# Altium PCB PCB_ERV-controller_2026-01-07.pcbdoc
Units mil, origin at the board's own origin, x right, y up, seen from the top; angles counter-clockwise.
Board outline 3667.48 x 3490.19 mil, 2 copper layers (Top Layer, Bottom Layer); 37 components, 28 nets, 179 pads, 87 vias.
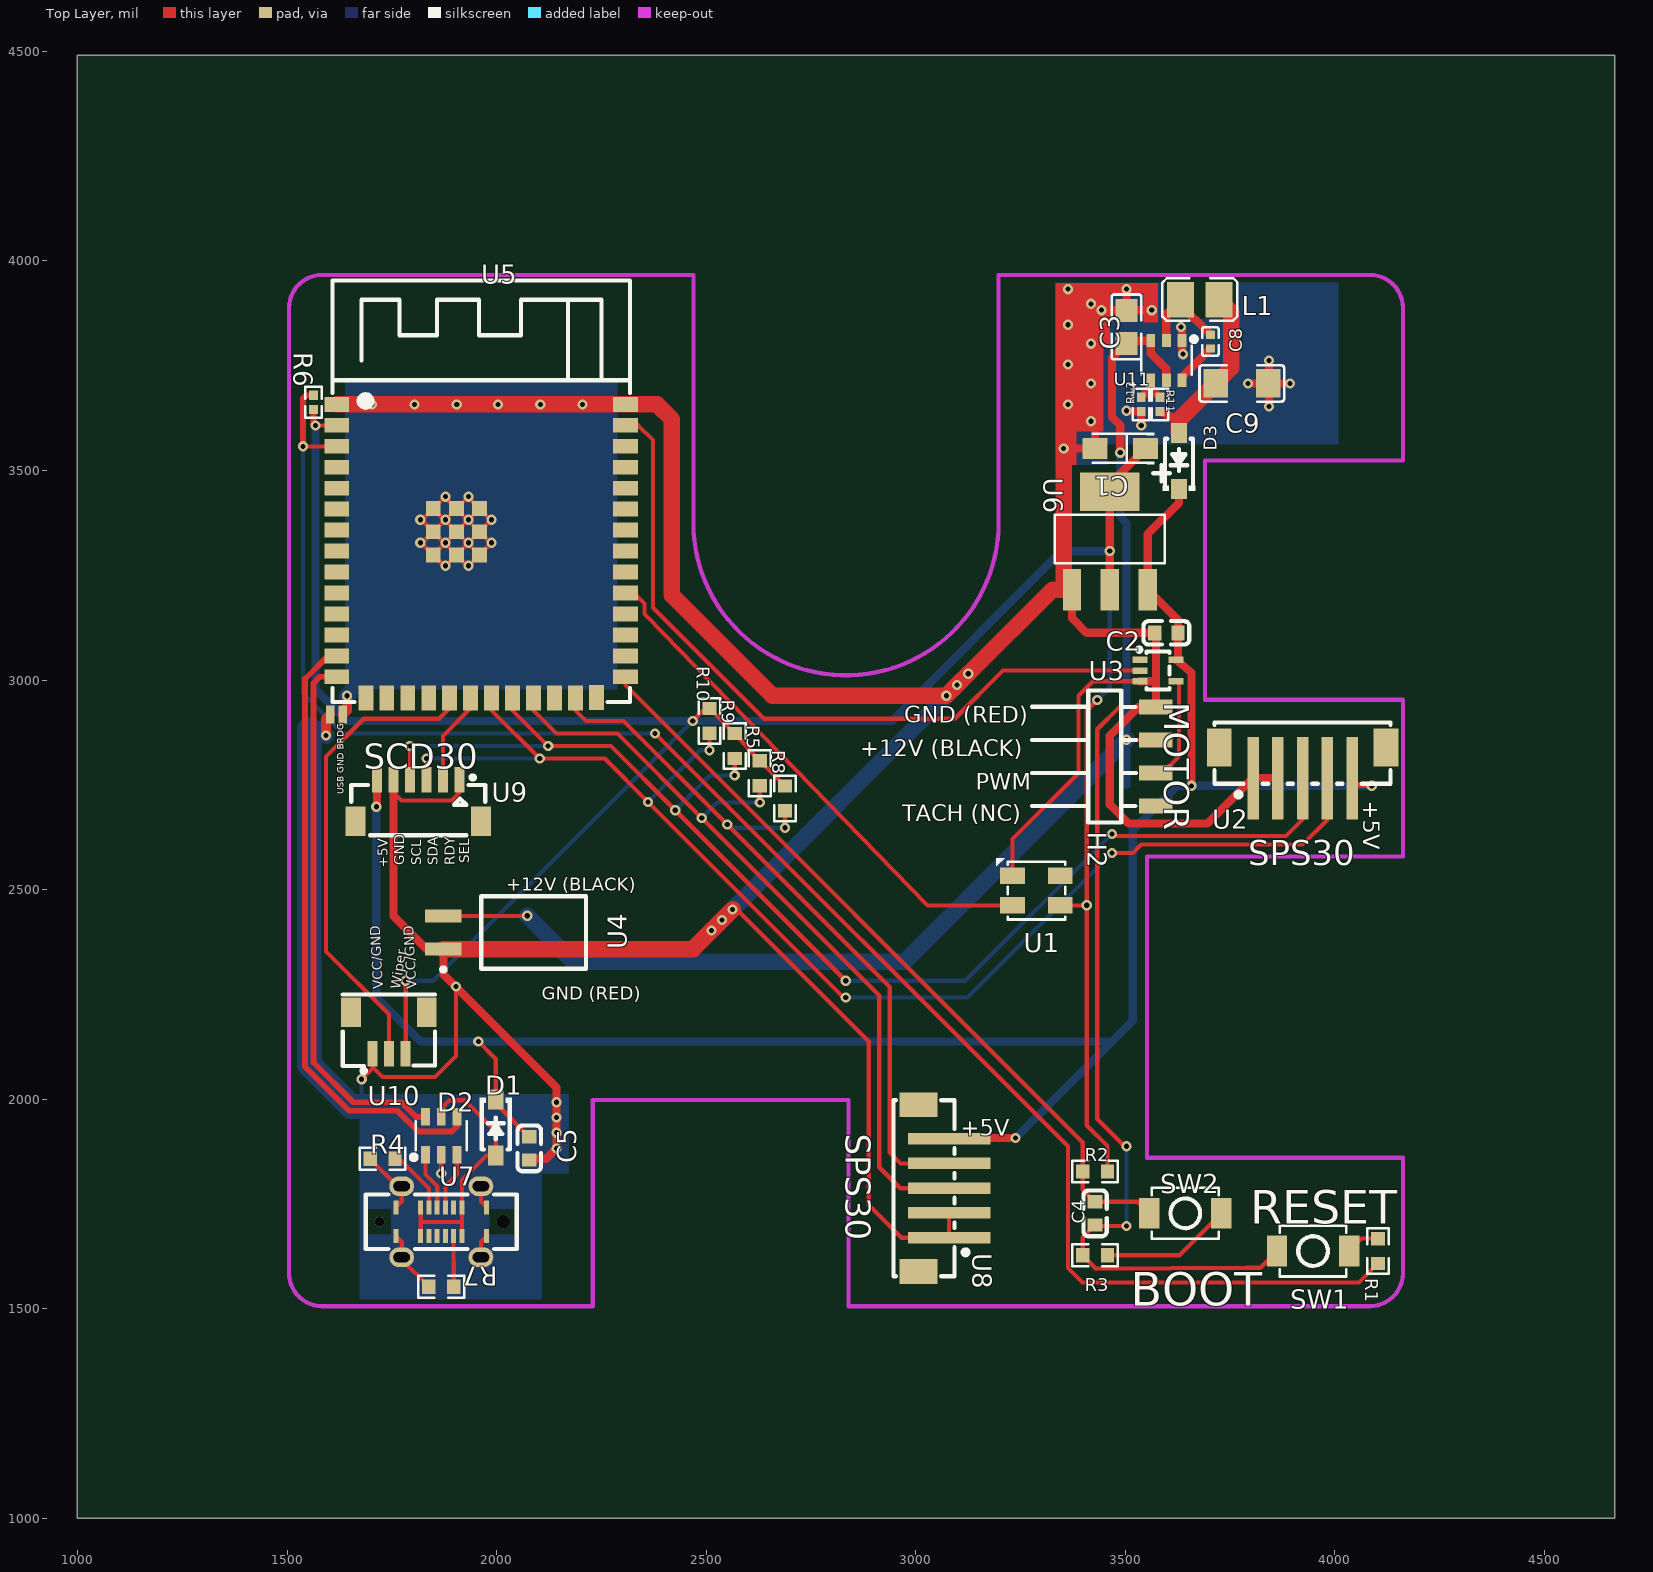
[diagram p0: Top Layer view]
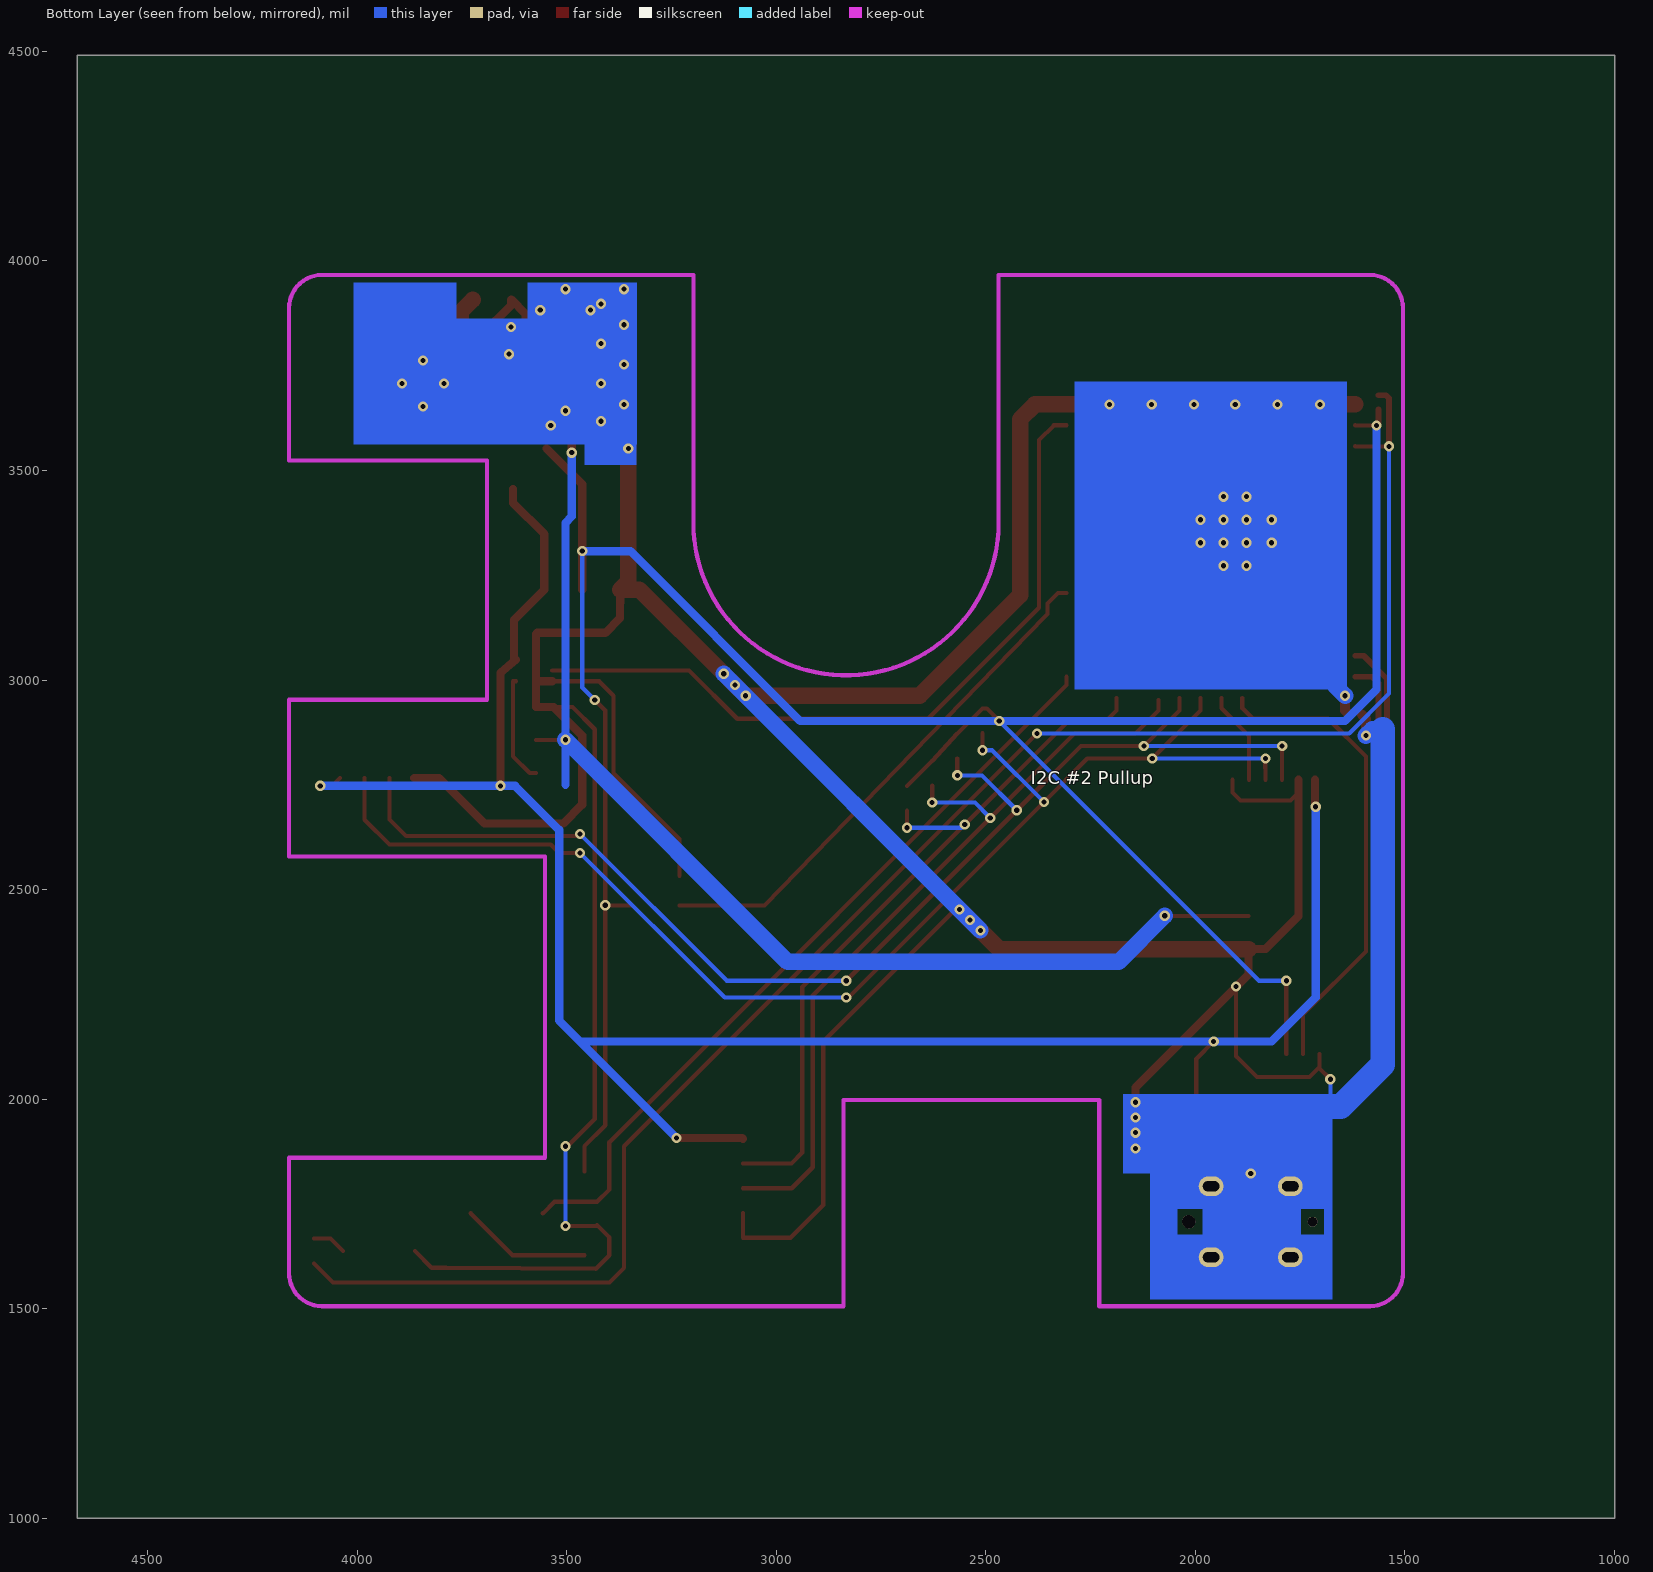
[diagram p1: Bottom Layer view, seen from below]

## Layer stack, top to bottom
Top Layer: signal copper (thickness not stored)
Dielectric: dielectric 12.6, FR-4, Dk 4.8
Bottom Layer: signal copper (thickness not stored)

## Board outline
4667.48,1000 1000,1000 1000,4490.19 4667.48,4490.19

## Components (designator, comment, footprint, x,y, rotation, side; value= is the part's Value field where it differs from the comment)
C1 "10uF" CAP-SMD_L3.2-W1.6-RD-C7171 3488.11,3552.5 r180 top
C2 "0.1u" C0603 3598.11,3112.5 r180 top
C3 "22uF" C0805 3503.11,3842.5 r90 top
C4 "0.1u" C0603 3428.11,1727.5 r90 top
C5 "0.1u" C0603 2078.11,1882.5 r270 top
C8 "100nF" C0402 3703.11,3807.5 r270 top
C9 "47uF" C1206 3778.11,3707.5 r180 top
D1 "B5819W_C8598" SOD-123_L2.7-W1.6-LS3.7-RD-1 1998.11,1932.5 r270 top
D2 "USBLC6-2SC6_C2687116" SOT-23-6_L2.9-W1.6-P0.95-LS2.8-BL 1868.11,1912.5 r0 top
D3 "B5819W_C8598" SOD-123_L2.7-W1.6-LS3.7-RD-1 3628.11,3522.5 r90 top
H2 "HX PZ2.0-1X4P WT" HDR-SMD_4P-P2.00-H-M-W6.0-N 3573.11,2817.5 r270 top
L1 "4.7uH" L1008 3678.11,3907.5 r0 top
R1 "100" R0603 4103.11,1637.5 r270 top
R2 "10k" R0603 3428.11,1827.5 r0 top
R3 "100" R0603 3428.11,1627.5 r180 top
R4 "5.1k" R0603 1728.11,1857.5 r0 top
R5 "10k" R0603 2628.11,2777.5 r90 top
R6 "10kΩ" R0402 1563.11,3662.5 r270 top
R7 "5.1k" R0603 1868.11,1552.5 r0 top
R8 "10k" R0603 2688.11,2717.5 r270 top
R9 "10k" R0603 2568.11,2842.5 r90 top
R10 "10k" R0603 2508.11,2902.5 r270 top
R11 "56.2kΩ" R0402 3583.11,3657.5 r270 top
R12 "10kΩ" R0402 3538.11,3657.5 r90 top
SW1 "TS-1088-AR02016" SW-SMD_L3.9-W3.0-P4.45 3948.11,1637.5 r0 top
SW2 "TS-1088-AR02016" SW-SMD_L3.9-W3.0-P4.45 3643.11,1727.5 r0 top
U1 "SK6812MINI-HS" LED-SMD_4P-L3.5-W3.5-BR_SK6812MINI-HS 3288.11,2497.5 r180 top
U2 "B5B-ZR-SM4-TFT(LF)(SN)" CONN-SMD_B5B-ZR-SM4-TFT 3923.11,2802.5 r0 top
U3 "SN74LV1T34DCKR" SC-70-5_L2.1-W1.3-P0.65-LS2.1-BR 3578.11,3022.5 r180 top
U4 "HX PM2.0-1X2P WT" HDR-SMD_HX-PM2.0-1X2P-WT 1873.11,2397.5 r90 top
U5 "ESP32-S3-WROOM-1(N8R8)" WIRELM-SMD_ESP32-S3-WROOM-1 1963.11,3307.5 r0 top
U6 "AZ1117CH-3.3TRG1" SOT-223-3_L6.5-W3.4-P2.30-LS7.0-BR 3463.11,3332.5 r270 top
U7 "TYPE-C 16P LTH6.8" USB-C-SMD_TYPE-C-16P-LTH6.8 1868.11,1707.5 r0 top
U8 "B5B-ZR-SM4-TFT(LF)(SN)" CONN-SMD_B5B-ZR-SM4-TFT 3043.11,1787.5 r90 top
U9 "BM06B-SRSS-TB(LF)(SN)" CONN-SMD-6P-P1.00_BM06B-SRSS-TB-LF-SN 1813.11,2712.5 r0 top
U10 "BM03B-SRSS-TB(LF)(SN)" CONN-SMD-3P-P1.00_BM03B-SRSS-TB-LF-SN 1743.11,2157.5 r180 top
U11 "TPS561208DDCR" TSOT-23-6_L2.9-W1.6-P0.95-LS2.8-BR 3598.11,3762.5 r90 top

## Footprints (in the part's own frame and the unit in brackets; to place one, negate y for a bottom-side part, rotate by r counter-clockwise, add the part's x,y. Pads: shape width x height; smd on the part's side, far side on the other; paste and mask are expansions set on the pad)
C0402 [mm]
  rect 0.5x0.54 smd paste+0 mask+0.051: 1(-0.42,0) 2(0.42,0)
  silkscreen extent -0.87,-0.5 0.87,0.5
C0603 [mm]
  rect 0.8x0.9 smd paste+0 mask+0.051: 1(-0.7,0) 2(0.7,0)
  silkscreen extent -1.39,-0.71 1.39,0.71
C0805 [mm]
  rect 1.41x1.35 smd paste-100 mask+0.051: 1(-1,0) 2(1,0)
  silkscreen extent -1.96,-0.9 1.96,0.9
C1206 [mm]
  rect 1.485x1.728 smd paste-100 mask+0.051: 1(-1.593,0) 2(1.593,0)
  silkscreen extent -2.56,-1.09 2.56,1.09
CAP-SMD_L3.2-W1.6-RD-C7171 [mm]
  rect 1.53x1.296 smd paste+0 mask+0.051: 1(-1.53,0) 2(1.53,0)
  silkscreen extent -3,-0.95 1.68,2
CONN-SMD-3P-P1.00_BM03B-SRSS-TB-LF-SN [mm]
  rect 0.6x1.55 smd paste+0 mask+0.051: 1(1,1.263) 2(0,1.263) 3(-1,1.263)
  rect 1.2x1.8 smd paste+0 mask+0.051: 4(2.3,-1.262) 5(-2.3,-1.263)
  silkscreen extent -2.8,-2.34 2.8,2.41
CONN-SMD-6P-P1.00_BM06B-SRSS-TB-LF-SN [mm]
  rect 0.6x1.55 smd paste+0 mask+0.051: 1(2.5,1.263) 2(1.5,1.263) 3(0.5,1.263) 4(-0.5,1.263) 5(-1.5,1.263) 6(-2.5,1.262)
  rect 1.2x1.8 smd paste+0 mask+0.051: 7(-3.8,-1.263) 8(3.8,-1.263)
  silkscreen extent -4.06,-2.1 4.06,1.52
CONN-SMD_B5B-ZR-SM4-TFT [mm]
  rect 0.7x5 smd paste+0 mask+0.05: 1(-3,-0.925) 2(-1.5,-0.925) 3(0,-0.925) 4(1.5,-0.925) 5(3,-0.925)
  rect 1.5x2.3 smd paste+0 mask+0.05: 6(5.05,0.925) 7(-5.05,0.925)
  silkscreen extent -5.33,-2.08 5.33,2.43
HDR-SMD_4P-P2.00-H-M-W6.0-N [mm]
  rect 0.89x2.03 smd paste+0 mask+0.05: 1(-3,0) 2(-1,0) 3(1,0) 4(3,0)
  silkscreen extent -4,-7.5 4,-1.2
HDR-SMD_HX-PM2.0-1X2P-WT [mm]
  rect 0.8x2.2 smd paste+0 mask+0.05: 1(-1,0) 2(1,0)
  silkscreen extent -2.37,-8.65 2.2,0.13
L1008 [mm]
  rect 1.635x2.16 smd paste-100 mask+0.051: 1(-1.168,0) 2(1.167,0)
  silkscreen extent -2.27,-1.27 2.27,1.3
LED-SMD_4P-L3.5-W3.5-BR_SK6812MINI-HS [mm]
  rect 1.5x1 smd paste+0 mask+0.051: 1(1.45,-0.9) 2(1.45,0.9) 3(-1.45,0.9) 4(-1.45,-0.9)
  silkscreen extent -1.75,-1.97 2.42,1.75
R0402 [mm]
  rect 0.566x0.54 smd paste-100 mask+0.051: 1(-0.433,0) 2(0.433,0)
  silkscreen extent -0.94,-0.5 0.94,0.5
R0603 [mil]
  rect 31.75x34.02 smd paste-3937.01 mask+2: 1(-29.65,0) 2(29.65,0)
  silkscreen extent -55,-26 55,26
SC-70-5_L2.1-W1.3-P0.65-LS2.1-BR [mm]
  rect 0.9x0.4 smd paste+0 mask+0.051: 1(1.1,-0.65) 2(1.1,0) 3(1.1,0.65) 4(-1.1,0.65) 5(-1.1,-0.65)
  silkscreen extent -0.7,-1.4 1.27,1.15
SOD-123_L2.7-W1.6-LS3.7-RD-1 [mm]
  rect 1.2x0.95 smd paste+0 mask+0.051: 1(-1.7,0) 2(1.7,0)
  silkscreen extent -1.81,-0.98 1.35,0.98
SOT-23-6_L2.9-W1.6-P0.95-LS2.8-BL [mm]
  rect 0.532x1.072 smd paste+0 mask+0.051: 1(-0.95,-1.149) 2(0,-1.149) 3(0.95,-1.149) 4(0.95,1.149) 5(0,1.149) 6(-0.95,1.149)
  silkscreen extent -1.82,-1.45 1.54,0.89
SOT-223-3_L6.5-W3.4-P2.30-LS7.0-BR [mm]
  rect 2.5x1.1 smd paste+0 mask+0.051: 1(2.97,-2.3) 2(2.97,0) 3(2.97,2.3)
  rect 2.34x3.6 smd paste+0 mask+0.051: 4(-2.97,0)
  silkscreen extent -1.57,-3.33 1.37,3.33
SW-SMD_L3.9-W3.0-P4.45 [mm]
  rect 1.23x1.86 smd paste+0 mask+0.051: 1(-2.185,0) 2(2.185,0)
  silkscreen extent -2.03,-1.54 2.03,1.54
TSOT-23-6_L2.9-W1.6-P0.95-LS2.8-BR [mm]
  rect 0.8x0.532 smd paste+0 mask+0.051: 1(1.2,-0.95) 2(1.2,0) 3(1.2,0.95) 4(-1.2,0.95) 5(-1.2,0) 6(-1.2,-0.95)
  silkscreen extent -0.88,-1.82 1.44,1.53
USB-C-SMD_TYPE-C-16P-LTH6.8 [mm]
  oval 1.5x1.2 hole 0.61 slot 1 at 0 deg paste+0 mask+0.051: 1(-2.4,2.15) 2(-2.4,-2.15) 3(2.4,2.15) 4(2.4,-2.15)
  rect 0.3x0.87 smd paste-100 mask+0.051: A1(-2.75,0.865) A4(-1.25,0.865) A5(-0.75,0.865) A6(-0.25,0.865) A7(0.25,0.865) A8(0.75,0.865) A9(1.25,0.865) A12(2.75,0.865) B1(2.75,-0.865) B4(1.25,-0.865) B5(0.75,-0.865) B6(0.25,-0.865) B7(-0.25,-0.865) B8(-0.75,-0.865) B9(-1.25,-0.865) B12(-2.75,-0.865)
  round 0.6 hole 0.6 unplated paste+0: ""(-3.75,0)
  round 0.8 hole 0.8 unplated paste+0: ""(3.75,0)
  silkscreen extent -4.57,-1.65 4.57,1.65
WIRELM-SMD_ESP32-S3-WROOM-1 [mm]
  rect 1.5x0.9 smd paste+0 mask+0.05: 1(-8.75,8.895) 2(-8.75,7.625) 3(-8.75,6.355) 4(-8.75,5.085) 5(-8.75,3.815) 6(-8.75,2.545) 7(-8.75,1.275) 8(-8.75,0.005) 9(-8.75,-1.265) 10(-8.75,-2.535) 11(-8.75,-3.805) 12(-8.75,-5.075) 13(-8.75,-6.345) 14(-8.75,-7.615) 27(8.75,-7.615) 28(8.75,-6.345) 29(8.75,-5.075) 30(8.75,-3.805) 31(8.75,-2.535) 32(8.75,-1.265) 33(8.75,0.005) 34(8.75,1.275) 35(8.75,2.545) 36(8.75,3.815) 37(8.75,5.085) 38(8.75,6.355) 39(8.75,7.625) 40(8.75,8.895)
  rect 0.9x1.5 smd paste+0 mask+0.05: 15(-6.985,-8.895) 16(-5.715,-8.895) 17(-4.445,-8.895) 18(-3.175,-8.895) 19(-1.905,-8.895) 20(-0.635,-8.895) 21(0.635,-8.895) 22(1.905,-8.895) 23(3.175,-8.895) 24(4.445,-8.895) 25(5.715,-8.895) 26(6.985,-8.865)
  rect 0.9x0.9 smd paste+0 mask+0.051: 41(-2.9,-0.225) 41(-2.9,1.175) 41(-2.9,2.575) 41(-1.501,-0.225) 41(-1.501,1.175) 41(-1.501,2.575) 41(-0.1,-0.225) 41(-0.1,1.175) 41(-0.1,2.575)
  silkscreen extent -9,-9.14 9.02,16.39

## Free pads (board coordinates)
  rect 20.95x42.2 smd paste+0 mask+2: 2(1633.11,2917.5) 3(1603.11,2917.5)

## Via types
v1: diameter 24.41, hole 12.2, Top Layer to Bottom Layer, tented both sides, 87 vias

## Nets (pads, with @x,y where several pads share a name; then routed paths per layer and width w, separated by ;. In a path a pad name is that pad's centre, name@x,y a point inside that pad or via, vN(x,y) a via of type N, cw(c..) or ccw(c..) an arc to the next point about the centre after c; other vN are vias at no path point)
+3V3: C1.1 R2.2 R5.2 R6.2 R8.1 R9.2 R10.1 U1.3 U5.2 U6.2 U6.4 U10.3 | length 6200.2
  Top Layer w10: v1(1568.11,3607.5) 1618.43,3607.5 U5.2 ; U10.3 1783.11,2108.42 v1(1783.11,2282.5) ; v1(2468.11,2902.5) 2497.77,2932.16 R10.1 R9.2 R5.2 R8.1 ; U1.3 v1(3408.11,2462.48) ; v1(3433.11,2952.5) 3408.11,2927.5 v1(3408.11,2462.48) ; R2.2 3457.81,1887.8 3408.11,1937.5 v1(3408.11,2462.48)
  Top Layer w13.78: R6.2 1563.11,3612.5 v1(1568.11,3607.5)
  Top Layer w19.68: U6.2 v1(3463.11,3307.5) U6.4 3463.11,3467.26 C1.1
  Bottom Layer w10: v1(1783.11,2282.5) 1848.11,2282.5 v1(2468.11,2902.5) ; v1(3433.11,2952.5) 3463.11,2982.5 v1(3463.11,3307.5)
  Bottom Layer w19.68: v1(1568.11,3607.5) 1568.11,2977.5 1629.91,2915.7 1643.11,2902.5 2943.11,2902.5 3348.11,3307.5 v1(3463.11,3307.5)
+5V: C2.1 C5.1 D1.1 D3.1 U2.5 U3.5 U6.3 U8.5 U9.6 | length 5062.8
  Top Layer w10: v1(1956.58,2137.5) 1998.11,2095.97 D1.1 1998.11,1990.06 C5.1 ; U2.5 4059.8,2747.5 v1(4088.11,2747.5)
  Top Layer w19.68: v1(1713.11,2697.5) 1714.69,2699.08 U9.6 ; U8.5 3081.42,1907.5 v1(3238.11,1907.5) ; U6.3@3553.66,3215.5 3553.66,3348.05 3628.11,3422.5 D3.1 ; U6.3 3625.67,3143.57 C2.1 3625.67,3052.34 U3.5 3658.11,3017.5 v1(3658.11,2747.5)
  Bottom Layer w19.68: v1(1713.11,2697.5) 1713.11,2242.5 1818.11,2137.5 v1(1956.58,2137.5) 3468.11,2137.5 ; v1(3238.11,1907.5) 3468.11,2137.5 ; v1(4088.11,2747.5) v1(3658.11,2747.5) 3623.11,2747.5 3518.11,2642.5 3518.11,2187.5 3468.11,2137.5
C8_2: C8.2 U11.6 | length 103.7
  Top Layer w19.68: U11.6 3635.51,3723.36 C8.2
C9_2: C9.2 D3.2 L1.2 R11.2 | length 462
  Top Layer w19.68: R11.2 3628.11,3620.2 D3.2
  Top Layer w39.37: D3.2 3628.11,3620.2 C9.2 3753.11,3745.2 3753.11,3878.47 L1.2
DN1: D2.3 U7.A7 | length 137.1
  Top Layer w10: U7.A7@1877.91,1741.6 1877.91,1792.3 1905.51,1819.9 1905.51,1830.79 D2.3
DP1: D2.1 U7.A6 | length 137.1
  Top Layer w10: D2.1 1830.71,1829.99 1830.71,1819.9 1858.31,1792.3 U7.A6
FANPWM: H2.3 U3.4 | length 257.2
  Top Layer w10: H2.3 3588.31,2778.1 3628.11,2817.9 3628.11,2996.9 U3.4
FANPWM3V3: U3.2 U5.39 | length 1799.2
  Top Layer w10: U5.39 2337.91,3607.7 2373.11,3572.5 2373.11,3172.5 2638.11,2907.5 3093.11,2907.5 3208.11,3022.5 U3.2
GND: C1.2 C2.2 C3.2 C4.1 C5.2 C9.1 D2.2 H2.1 pad.2 pad.3 R3.2 R4.1 R7.1 R12.1 SW1.1 U1.1 U2.1 U2.2 U3.3 U4.1 U5.1 U5.40 U5.41 U6.1 U7.1 U7.2 U7.3 U7.4 U7.A1 U7.A12 U7.B1 U7.B12 U8.1 U8.2 U9.1 U9.5 U10.1 U11.1 | length 15075.7
  Top Layer w10: v1(1678.11,2047.5) 1703.74,2073.13 U10.1 ; R4.1@1698.45,1857.5 1763.8,1792.15 1773.62,1792.15 1773.62,1755.33 U7.A1 ; U10.1 1703.71,2076.9 1728.11,2052.5 1853.11,2052.5 1903.11,2102.5 v1(1903.11,2268.75) ; U9.5 1754.01,2731.6 1773.11,2712.5 1892.61,2712.5 1911.71,2731.6 U9.1 ; U7.B12 1773.62,1659.66 1773.62,1622.85 1773.62,1617.33 R7.1@1838.45,1552.5 ; U5.41@1848.91,3298.6 v1(1878.11,3327.5) ; U5.41@1848.91,3353.8 v1(1878.11,3382.5) ; U5.41@1848.91,3408.9 v1(1878.11,3437.5) 1878.11,3434.82 1904.05,3408.88 1930.42,3382.5 v1(1933.11,3382.5) ; v1(1868.11,1822.5) D2.2 ; U5.41@1959.17,3298.64 1933.11,3324.7 v1(1933.11,3327.5) ; U5.41@1959.21,3408.9 v1(1933.11,3382.5) ; U7.4@1962.6,1622.85 1962.6,1659.66 U7.B1 ; U7.3@1962.6,1792.15 1962.6,1755.33 U7.A12 ; v1(2563.11,2452.5) 2573.11,2452.5 2888.11,2137.5 2888.11,1747.5 2966.22,1669.39 U8.1 3079.53,1699.39 U8.2 ; U1.1 3231.01,2620.4 3388.11,2777.5 3388.11,2962.5 3422.51,2996.9 3478.71,2996.9 U3.3 ; v1(3503.11,1697.5) 3430.55,1697.5 C4.1 3398.45,1670.28 3398.45,1627.5 3430.79,1595.15 3788.11,1597.5 3822.09,1597.5 SW1.1 ; v1(3503.11,1887.5) 3498.11,1887.5 3433.11,1952.5 3433.11,2882.5 3486.21,2935.6 H2.1 ; U5.41@1848.93,3353.76 1875.18,3327.5 v1(1878.11,3327.5) ; U5.41@1848.93,3353.76 1822.67,3327.5 v1(1818.11,3327.5) 1820.06,3327.5 1848.93,3298.64 1875.06,3272.5 v1(1878.11,3272.5) 1904.01,3298.6 v1(1933.11,3327.5) ; U5.41@1848.93,3353.76 1820.18,3382.5 v1(1818.11,3382.5) 1822.55,3382.5 1848.93,3408.88 1875.3,3382.5 v1(1878.11,3382.5) ; v1(1878.11,3327.5) 1904.01,3353.8 v1(1933.11,3382.5) ; v1(1878.11,3327.5) 1878.11,3324.57 1904.05,3298.64 1930.18,3272.5 v1(1933.11,3272.5) 1959.21,3298.6 v1(1988.11,3327.5) 1985.42,3327.5 1959.17,3353.76 1933.11,3379.82 v1(1933.11,3382.5) ; v1(1878.11,3382.5) 1878.11,3379.7 1904.05,3353.76 1930.3,3327.5 v1(1933.11,3327.5) ; v1(1878.11,3382.5) 1904.01,3408.9 v1(1933.11,3437.5) 1933.11,3434.93 1959.17,3408.88 1985.54,3382.5 v1(1988.11,3382.5) 1959.21,3353.8 v1(1933.11,3327.5)
  Top Layer w19.68: U9.5 1754.01,2436.6 1832.51,2358.1 U4.1 ; U4.1 1873.11,2297.5 2143.11,2027.5 v1(2143.11,1992.55) v1(2143.11,1955.88) 2143.11,1920.05 v1(2143.11,1882.5) 2118.11,1857.5 2080.67,1857.5 C5.2 ; v1@3363.11,3552.3 C1.2 3428.11,3597.5 ; U6.1@3372.51,3215.6 3373.11,3147.5 3408.11,3112.5 C2.2@3570.51,3112.5 ; v1(3443.11,3882.5) 3502.48,3882.5 C3.2 ; v1(3503.11,3642.5) 3505.15,3640.46 R12.1 v1(3538.11,3607.5) ; v1(3503.11,3932.5) C3.2 ; v1(3563.11,3882.5) 3503.74,3882.5 C3.2 ; C2.2@3570.55,3112.5 3573.11,3109.94 3573.11,2996.91 ; v1(3633.11,3842.5) 3635.51,3840.1 U11.1 3635.51,3780.1 v1(3638.11,3777.5) ; v1(3793.11,3707.5) C9.1 ; U2.1@3805,2751.08 U2.1 ; v1(3843.11,3652.5) 3843.11,3705.2 C9.1 ; v1(3843.11,3762.5) 3843.11,3709.8 C9.1 ; U2.2 U2.1 ; v1(3893.11,3707.5) C9.1 ; 3573.11,2996.91 U3.3 3573.11,2996.91 ; 3573.11,2996.91 H2.1 3531.21,2935.6 3463.11,2867.5 3463.11,2702.5 3508.11,2657.5 3696.41,2657.5 U2.1
  Top Layer w23.62: v1(1593.11,2867.5) 1593.11,2907.5 pad.3 ; pad.2 1643.11,2927.5 v1(1643.11,2962.5)
  Top Layer w39.37: U5.1 1618.81,3657.5 v1(1703.11,3657.5) v1(1804.42,3657.5) v1(1905.08,3657.5) v1(2003.75,3657.5) v1(2104.42,3657.5) v1(2205.08,3657.5) 2307.41,3657.5 U5.40 2382.92,3657.69 2418.11,3622.5 2418.11,3202.5 2658.11,2962.5 3008.11,2962.5 v1(3073.11,2962.5) v1(3098.55,2987.94) v1(3125.55,3014.94) ; U4.1 2468.74,2358.13 v1(2563.11,2452.5) ; v1(3125.55,3014.94) 3327.21,3215.9 3372.51,3215.6 3353.11,3235 v1(3353.11,3552.19) 3353.11,3602.5
  Bottom Layer w10: 1678.11,2002.5 v1(1678.11,2047.5) ; v1(3503.11,1697.5) v1(3503.11,1887.5)
  Bottom Layer w39.37: 1558.11,2882.5 1578.11,2882.5 v1(1593.11,2867.5) ; v1(1643.11,2962.5) 1668.11,2987.5 1668.11,3002.5 ; v1(2513.11,2402.5) v1(3125.55,3014.94)
  Bottom Layer w59.05: 1553.11,2882.5 1553.11,2082.5 1653.11,1982.5 1783.11,1982.5
  other v1: 2143.11,1920.05 2538.11,2427.5 3418.11,3617.5 3363.11,3657.5 3418.11,3707.5 3363.11,3752.5 3418.11,3802.5 3363.11,3847.5 3418.11,3897.5 3363.11,3932.5
LEDCTL: U1.2 U5.31 | length 1252.9
  Top Layer w10: U5.31 2327.91,3207.7 2353.11,3182.5 2353.11,3157.5 2358.11,3152.5 3028.51,2462.1 U1.2
POTWIPER: U5.19 U10.2 | length 1139.3
  Top Layer w10: U10.2 1743.11,2202.5 1593.11,2352.5 1593.11,2817.5 1683.11,2907.5 1863.11,2907.5 1888.11,2932.5 U5.19
R1_1: R1.1 SW1.2 | length 81.3
  Top Layer w10: SW1.2 4063.79,1667.16 R1.1
R3_1: R3.1 SW2.2 | length 312.8
  Top Layer w10: R3.1 3629.13,1627.5 SW2.2
R12_2: R11.1 R12.2 U11.4 | length 100.1
  Top Layer w19.68: R12.2 3560.35,3696.79 U11.4 3560.35,3697.29 R11.1
RDY: U5.20 U9.2 | length 222.4
  Top Layer w10: U9.2 1872.15,2866.54 1938.11,2932.5 U5.20
SCL: R5.1 U5.23 U8.3 | length 1920.6
  Top Layer w10: U5.23@2088.11,2952.5 2088.11,2927.5 2143.11,2872.5 2288.11,2872.5 v1@2488.11,2672.5 ; v1(2489.61,2671) 2913.11,2247.5 2913.11,1837.5 2963.11,1787.5 U8.3 ; v1(2628.11,2707.5) R5.1
  Bottom Layer w10: v1(2489.61,2671) 2526.12,2707.5 v1(2628.11,2707.5)
SCL2: R9.1 U2.3 U5.22 U9.4 | length 3074.1
  Top Layer w10: v1(1793.11,2842.5) 1793.41,2842.2 U9.4 ; U5.22 2038.11,2927.5 v1(2123.11,2842.5) 2273.11,2842.5 v1(2426.28,2689.33) v1(2833.11,2282.5) ; v1(2568.11,2772.5) R9.1 ; v1(3468.11,2632.5) 3468.11,2627.5 3883.11,2627.5 3923.11,2667.5 U2.3
  Bottom Layer w10: v1(1793.11,2842.5) v1(2123.11,2842.5) ; v1(2426.28,2689.33) 2509.45,2772.5 v1(2568.11,2772.5) ; v1(2833.11,2282.5) 3118.11,2282.5 v1(3468.11,2632.5)
SDA: R8.2 U5.25 U8.4 | length 1781.4
  Top Layer w10: U5.25 2188.11,2927.5 2213.11,2902.5 2303.11,2902.5 v1(2550.45,2655.16) ; v1(2550.45,2655.16) 2938.11,2267.5 2938.11,1872.5 2964.01,1846.6 U8.4 ; v1(2688.11,2647.5) R8.2
  Bottom Layer w10: v1(2550.45,2655.16) 2558.11,2647.5 v1(2688.11,2647.5)
SDA2: R10.2 U2.4 U5.21 U9.3 | length 3141.2
  Top Layer w10: U9.3 v1@1833.26,2812.65 ; U5.21 1988.11,2927.5 v1(2103.11,2812.5) 2258.11,2812.5 v1(2361.61,2709) 2828.11,2242.5 v1(2833.11,2242.5) ; v1(2508.11,2832.5) R10.2 ; v1(3468.11,2587.5) 3518.11,2587.5 3538.11,2607.5 3908.11,2607.5 3923.11,2607.5 3982.21,2666.6 U2.4
  Bottom Layer w10: v1(1833.11,2812.5) v1(2103.11,2812.5) ; v1(2361.61,2709) 2485.12,2832.5 v1(2508.11,2832.5) ; v1(2833.11,2242.5) 3123.11,2242.5 v1(3468.11,2587.5)
SW: C8.1 L1.1 U11.2 | length 224.7
  Top Layer w19.68: U11.2 3598.11,3873.46 L1.1 3632.15,3895 C8.1
U5_3: R1.2 R6.1 U5.3 | length 4149.1
  Top Layer w10: v1(1538.11,3557.5) 1618.43,3557.5 U5.3 ; v1(2378.11,2872.5) 3363.11,1887.5 3363.11,1597.5 3398.11,1562.5 4057.81,1562.5 R1.2
  Top Layer w13.78: v1(1538.11,3557.5) 1538.11,3672.5 1545.11,3679.5 R6.1
  Bottom Layer w10: v1(1538.11,3557.5) 1538.11,2967.5 1633.11,2872.5 v1(2378.11,2872.5)
U5_27: C4.2 R2.1 SW2.1 U5.27 | length 1857.2
  Top Layer w10: U5.27 2307.6,2988.01 3398.45,1897.16 3398.45,1827.5 3398.45,1784.72 C4.2 3529.53,1755.06 SW2.1
U7_A5: R4.2 U7.A5 | length 155.4
  Top Layer w10: R4.2 1768.11,1857.5 1838.61,1787 U7.A5
U7_B5: R7.2 U7.B5 | length 120.9
  Top Layer w10: U7.B5 R7.2
USB_D_N: D2.4 U5.13 | length 1477.9
  Top Layer w13.78: U5.13 1598.31,3057.7 1543.11,3002.5 1543.11,2077.5 1648.11,1972.5 1763.11,1972.5 1813.11,1922.5 1893.11,1922.5 1905.51,1934.9 D2.4
USB_D_P: D2.6 U5.14 | length 1288.2
  Top Layer w13.78: U5.14 1578.31,3007.7 1563.11,2992.5 1563.11,2915.4 1563.11,2087.5 1658.11,1992.5 1773.11,1992.5 1807.91,1957.7 D2.6
VBUSRAW: D1.2 D2.5 U7.A4 U7.A9 U7.B4 U7.B9 | length 651
  Top Layer w10: U7.B9 U7.A4 ; 1818.89,1707.1 1917.32,1707.1 ; D2.5 1868.11,1977.5 1888.11,1997.5 1923.11,1997.5 1998.11,1922.5 D1.2 ; U7.B4 U7.A9 ; U7.A9 1917.31,1806.7 1976.21,1865.6 D1.2
VCC: C3.1 H2.2 U4.2 U11.3 U11.5 | length 3218
  Top Layer w10: U4.2 2072.48,2436.87 v1(2073.11,2437.5) ; v1(3503.11,2857.5) 3503.74,2856.87 H2.2
  Top Layer w19.68: v1(3488.11,3542.5) 3488.11,3607.5 3468.11,3627.5 3468.11,3768.1 C3.1 ; C3.1 3509.72,3809.74 U11.3 3560.71,3779.9 3598.11,3742.5 U11.5
  Bottom Layer w19.68: v1(3488.11,3542.5) 3488.11,3390 3503.11,3375 3503.11,2750
  Bottom Layer w39.37: v1(2073.11,2437.5) 2183.11,2327.5 2973.11,2327.5 v1(3503.11,2857.5)
pads on no net: H2.4 U1.4 U2.6 U2.7 U3.1 U5.4 U5.5 U5.6 U5.7 U5.8 U5.9 U5.10 U5.11 U5.12 U5.15 U5.16 U5.17 U5.18 U5.24 U5.26 U5.28 U5.29 U5.30 U5.32 U5.33 U5.34 U5.35 U5.36 U5.37 U5.38 U7. U7.A8 U7.B6 U7.B7 U7.B8 U8.6 U8.7 U9.7 U9.8 U10.4 U10.5

## Keep-outs
Keep-Out Layer:
  lines w10: 1505,1584.69 ccw(c1583.74,1584.69) 1583.74,1505.95 ; 1505,3887.84 cw(c1583.74,3887.84) 1583.74,3966.58 ; 2469.56,3376.03 ccw(c2833.74,3375.42) 3197.91,3376.03 ; 4083.73,1505.95 ccw(c4083.73,1584.69) 4162.47,1584.69 ; 4083.73,3966.58 cw(c4083.73,3887.84) 4162.47,3887.84

## Other copper
Top Layer:
  rectangle net GND: 3333.11,3592.5 3448.11,3947.5
  rectangle net GND: 3448.11,3797.5 3463.11,3947.5
  rectangle net GND: 3463.11,3922.5 3578.11,3947.5
  rectangle net GND: 3543.11,3852.5 3578.11,3922.5
  rectangle net GND: 3373.11,3512.5 3383.11,3592.5
Bottom Layer:
  region net GND: 3333.11,3947.5 3593.11,3947.5 3593.11,3862.5 3763.11,3862.5 3763.11,3947.5 3888.11,3947.5 4008.11,3947.5 4008.11,3562.5 3333.11,3562.5
  rectangle net GND: 1638.11,2977.5 2288.11,3712.5
  rectangle net GND: 3333.11,3512.5 3458.11,3562.5
  rectangle net GND: 1673.11,1522.5 1693.11,2012.5
  rectangle net GND: 2043.11,1522.5 2108.11,2012.5
  rectangle net GND: 1693.11,1522.5 2043.11,1677.5
  rectangle net GND: 1693.11,1737.5 2043.11,2012.5
  rectangle net GND: 1748.11,1677.5 1983.11,1737.5
  rectangle net GND: 2108.11,1822.5 2173.11,2012.5

## Silkscreen, mask and mechanical layers (free items; w line width, h text height)
Top Overlay:
  text "MOTOR" at 3593.58,2947.5 h59.05 r270
  text "GND (RED)" at 2973.11,2897.82 h39.37
  text "+12V (BLACK)" at 2868.11,2817.82 h39.37
  text "SCD30" at 1683.11,2787.97 h59.05
  text "PWM" at 3143.11,2737.82 h39.37
  text "USB GND BRDG" at 1635.98,2727.5 h15.75 r90
  text "+5V" at 4068.42,2712.5 h39.37 r270
  text "TACH (NC)" at 2968.11,2662.82 h39.37
  text "SEL" at 1934.92,2562.5 h23.62 r90
  text "GND" at 1779.92,2557.5 h23.62 r90
  text "SCL" at 1819.92,2557.5 h23.62 r90
  text "SDA" at 1859.92,2557.5 h23.62 r90
  text "RDY" at 1899.92,2557.5 h23.62 r90
  text "SPS30" at 3793.11,2557.97 h59.05
  text "+5V" at 1739.92,2552.5 h23.62 r90
  text "+12V (BLACK)" at 2023.11,2496.75 h31.5
  text "VCC/GND" at 1729.9,2263.12 h23.62 r93
  text "VCC/GND" at 1809.9,2263.12 h23.62 r93
  text "Wiper" at 1769.77,2260.65 h23.62 r81
  text "GND (RED)" at 2108.11,2236.75 h31.5
  text "SPS30" at 2833.58,1917.5 h59.05 r270
  text "+5V" at 3108.11,1912.82 h39.37
  text "RESET" at 3798.11,1702.5 h80
  text "BOOT" at 3513.11,1507.5 h80
Bottom Overlay:
  text "I2C #2 Pullup" at 2393.11,2751.75 h31.5
Bottom Solder:
  lines w14: 2361.61,2709 2485.12,2832.5 2508.11,2832.5 ; 2426.28,2689.33 2509.45,2772.5 2568.11,2772.5